# EAGLE board SAME54-board-1.0.1 (EAGLE 9.6.2)
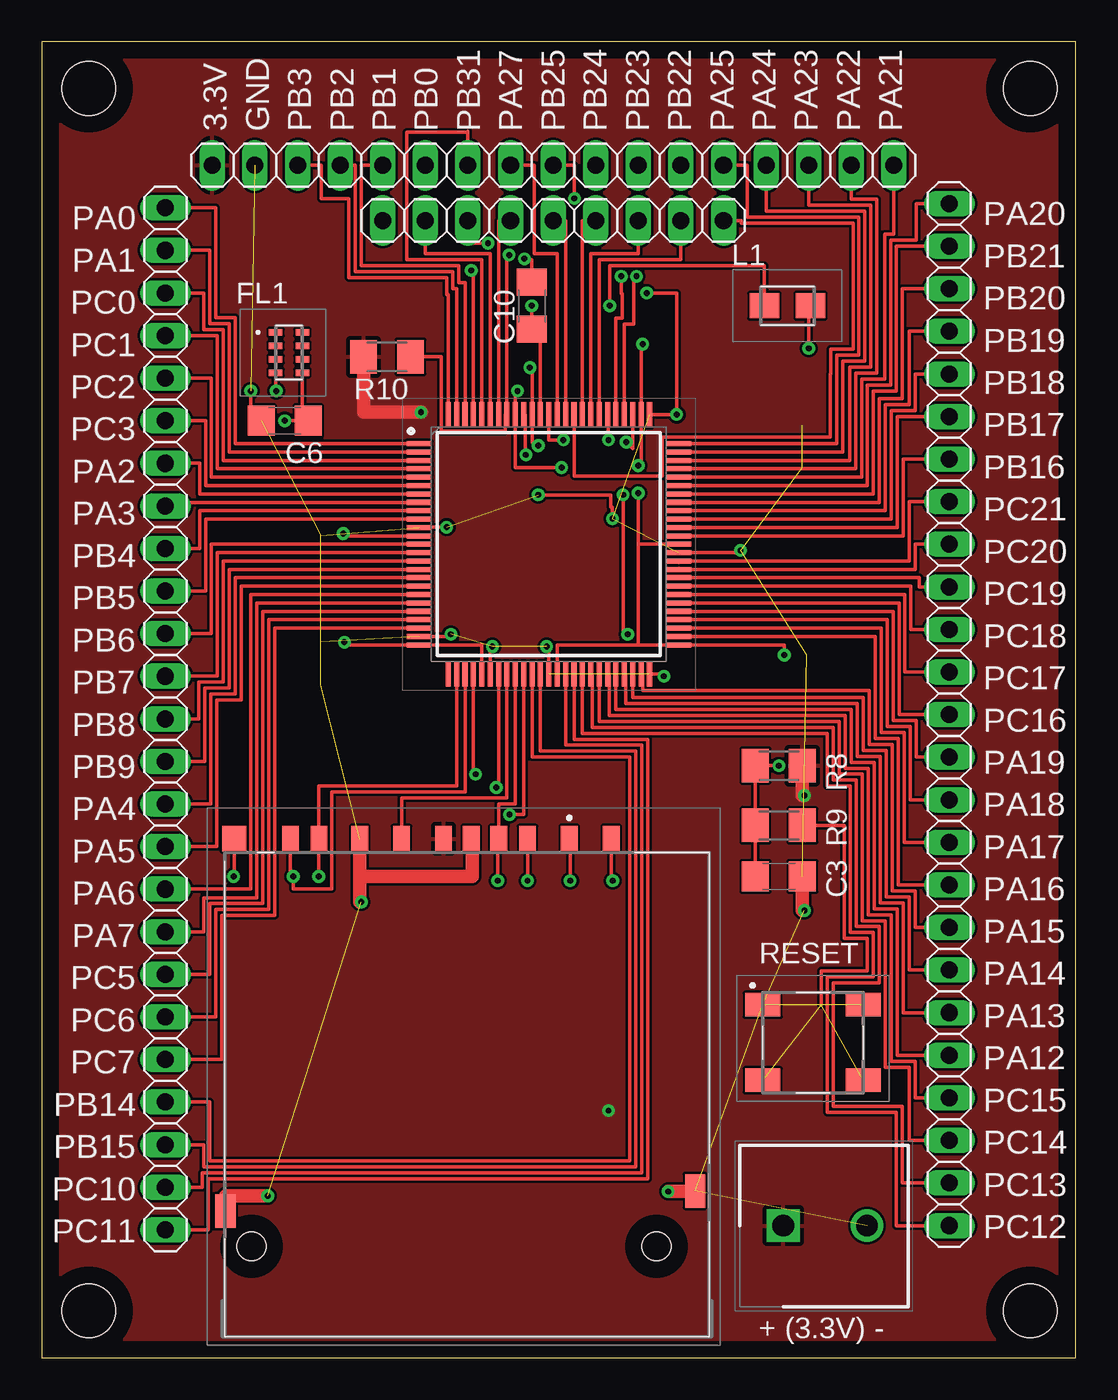
[diagram p0: board, top side]
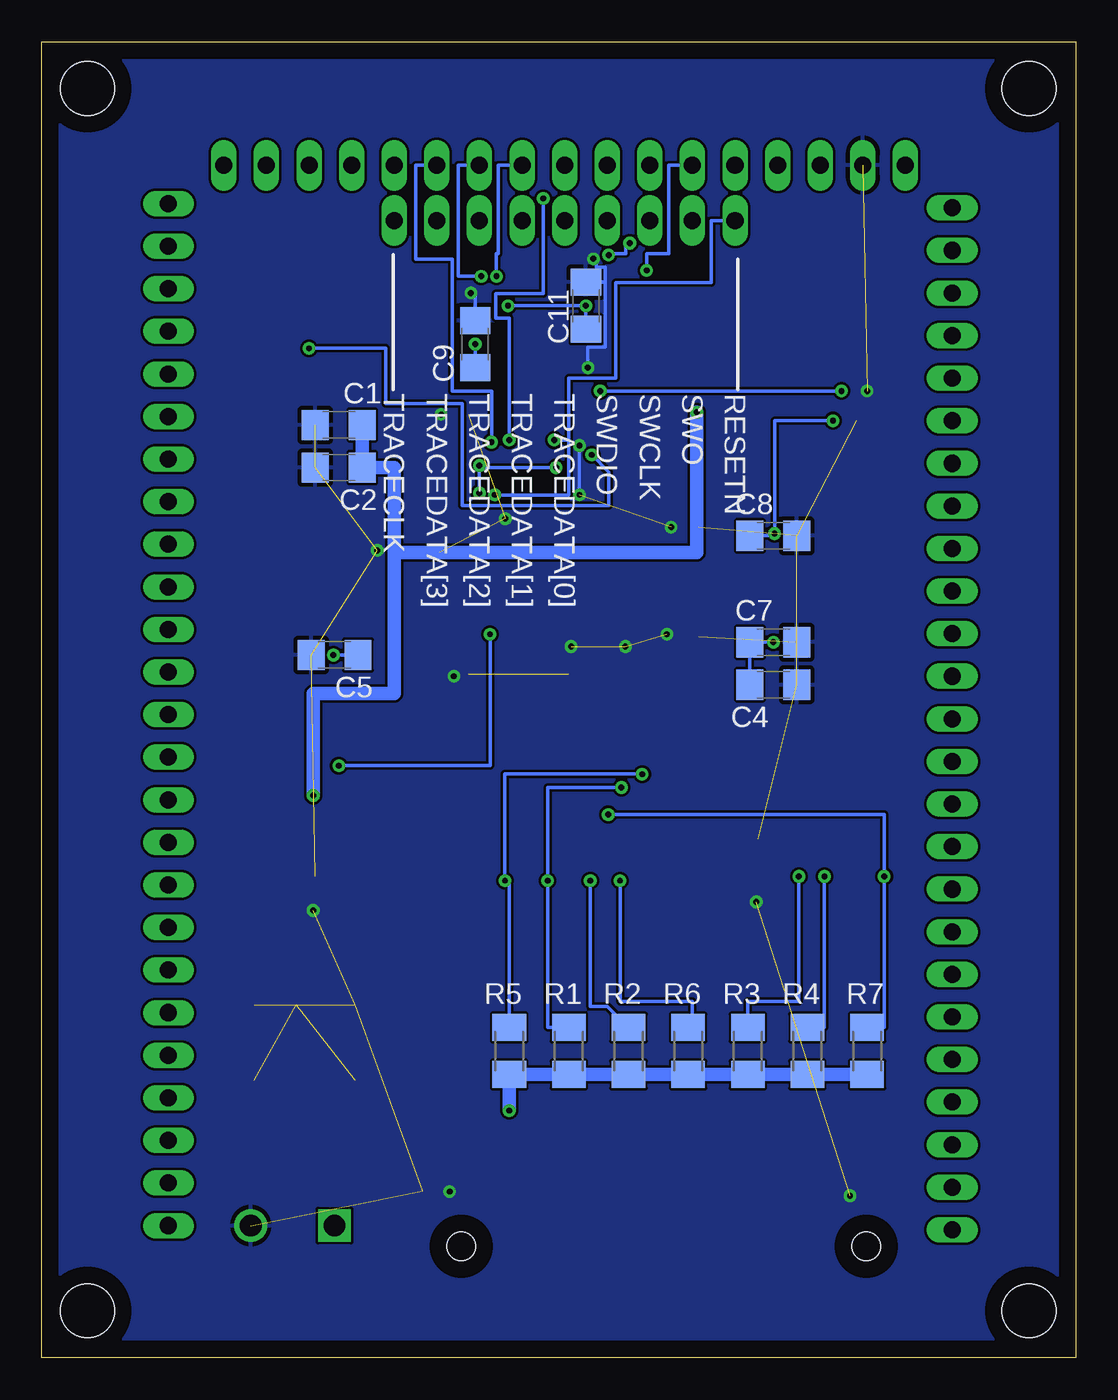
[diagram p1: board, bottom side, seen from below]

Size 61.65 x 78.48 mm. Coordinates in mm from the lower left corner, seen from the top.
Outline: 0,0 61.65,0 61.65,78.48 0,78.48 0,0
Copper layers (1*16): Top 0.035mm / dielectric 1.5mm / Bottom 0.035mm
Design rules "default": minimum track width 6mil, minimum drill 0.35mm, track to track 6mil, track to pad 6mil, pad to pad 6mil, via to via 6mil, smd to smd 6mil, copper to edge 40mil, drill to drill 6mil, minimum pad ring 10mil, minimum via ring 8mil, stop-mask expansion 4mil, vias tented up to drill 0mil, thermal gap 10mil
Holes 3.2 mm at 2.79,2.79 58.93,2.79 2.79,75.69 58.93,75.69

## Footprints (pad centres in the part's own frame; a part is rotated, then mirrored left to right if it is on the bottom)
C1206 = smd 1.6 x 1.8: 1 -1.4,0; 2 1.4,0
BLA31AG102SN4D = smd 0.8 x 0.4: 1 -0.8,1.2; 2 -0.8,0.4; 3 -0.8,-0.4; 4 -0.8,-1.2; 5 0.8,-1.2; 6 0.8,-0.4; 7 0.8,0.4; 8 0.8,1.2
QFP50P1600X1600X120-100N = smd 1.475 x 0.3: 1 -7.738,6; 2 -7.738,5.5; 3 -7.738,5; 4 -7.738,4.5; 5 -7.738,4; 6 -7.738,3.5; 7 -7.738,3; 8 -7.738,2.5; 9 -7.738,2; 10 -7.738,1.5; 11 -7.738,1; 12 -7.738,0.5; 13 -7.738,0; 14 -7.738,-0.5; 15 -7.738,-1; 16 -7.738,-1.5; 17 -7.738,-2; 18 -7.738,-2.5; 19 -7.738,-3; 20 -7.738,-3.5; 21 -7.738,-4; 22 -7.738,-4.5; 23 -7.738,-5; 24 -7.738,-5.5; 25 -7.738,-6; 51 7.738,-6; 52 7.738,-5.5; 53 7.738,-5; 54 7.738,-4.5; 55 7.738,-4; 56 7.738,-3.5; 57 7.738,-3; 58 7.738,-2.5; 59 7.738,-2; 60 7.738,-1.5; 61 7.738,-1; 62 7.738,-0.5; 63 7.738,0; 64 7.738,0.5; 65 7.738,1; 66 7.738,1.5; 67 7.738,2; 68 7.738,2.5; 69 7.738,3; 70 7.738,3.5; 71 7.738,4; 72 7.738,4.5; 73 7.738,5; 74 7.738,5.5; 75 7.738,6 | smd 0.3 x 1.475: 26 -6,-7.738; 27 -5.5,-7.738; 28 -5,-7.738; 29 -4.5,-7.738; 30 -4,-7.738; 31 -3.5,-7.738; 32 -3,-7.738; 33 -2.5,-7.738; 34 -2,-7.738; 35 -1.5,-7.738; 36 -1,-7.738; 37 -0.5,-7.738; 38 0,-7.738; 39 0.5,-7.738; 40 1,-7.738; 41 1.5,-7.738; 42 2,-7.738; 43 2.5,-7.738; 44 3,-7.738; 45 3.5,-7.738; 46 4,-7.738; 47 4.5,-7.738; 48 5,-7.738; 49 5.5,-7.738; 50 6,-7.738; 76 6,7.738; 77 5.5,7.738; 78 5,7.738; 79 4.5,7.738; 80 4,7.738; 81 3.5,7.738; 82 3,7.738; 83 2.5,7.738; 84 2,7.738; 85 1.5,7.738; 86 1,7.738; 87 0.5,7.738; 88 0,7.738; 89 -0.5,7.738; 90 -1,7.738; 91 -1.5,7.738; 92 -2,7.738; 93 -2.5,7.738; 94 -3,7.738; 95 -3.5,7.738; 96 -4,7.738; 97 -4.5,7.738; 98 -5,7.738; 99 -5.5,7.738; 100 -6,7.738
GSD09002SEU = smd 1.5 x 1: 1 -14.183,6.3; 2 -14.183,3.8; 3 -14.183,0.45; 4 -14.183,-1.2; 5 -14.183,-3.7; 6 -14.183,-6.2; 7 -14.183,-8.63; 8 -14.183,-10.33; 9 -14.183,8.8; CD1 -14.183,2.1 | smd 2 x 1.2: G1 6.827,13.8; G2 8.027,-14.2 | smd 1.5 x 1.45: WP1 -14.183,-13.68 | hole 1.7: 10.127,11.5; 10.127,-12.65
SHDR2W110P0X500_1X2_1000X950X1 = drill 1.3 pad 1.95 square: 1 0,0 | drill 1.3 pad 1.95: 2 5,0
1X25 = drill 1.016 long: 1 -29.21,0; 2 -26.67,0; 3 -24.13,0; 4 -21.59,0; 5 -19.05,0; 6 -16.51,0; 7 -13.97,0; 8 -11.43,0; 9 -8.89,0; 10 -6.35,0; 11 -3.81,0; 12 -1.27,0; 13 1.27,0; 14 3.81,0; 15 6.35,0; 16 8.89,0; 17 11.43,0; 18 13.97,0; 19 16.51,0; 20 19.05,0; 21 21.59,0; 22 24.13,0; 23 26.67,0; 24 29.21,0; 25 31.75,0
1X09 = drill 1.016 long: 1 -10.16,0; 2 -7.62,0; 3 -5.08,0; 4 -2.54,0; 5 0,0; 6 2.54,0; 7 5.08,0; 8 7.62,0; 9 10.16,0
1X17 = drill 1.016 long: 1 -20.32,0; 2 -17.78,0; 3 -15.24,0; 4 -12.7,0; 5 -10.16,0; 6 -7.62,0; 7 -5.08,0; 8 -2.54,0; 9 0,0; 10 2.54,0; 11 5.08,0; 12 7.62,0; 13 10.16,0; 14 12.7,0; 15 15.24,0; 16 17.78,0; 17 20.32,0
LQH31CN100K03L = smd 1.75 x 1.5: 1 -1.375,0; 2 1.375,0
M1206 = smd 1.6 x 2: 1 -1.4,0; 2 1.4,0
LL3301BF065QJ = smd 2.1 x 1.4: 1 -3,2.25; 2 3,2.25; 3 -3,-2.25; 4 3,-2.25

## Placement (x,y rotation side)
C1  100n  [C1206]  43.94,55.63 180 bottom
C2  10uF/10V  [C1206]  43.94,53.09 180 bottom
C3  100n  [C1206]  43.94,28.7 0 top
C4  10u  [C1206]  18.03,40.13 0 bottom
C5  10u  [C1206]  44.2,41.91 180 bottom
C6  10u  [C1206]  14.48,55.88 180 top
C7  100n  [C1206]  18.03,42.67 0 bottom
C8  100n  [C1206]  18.03,49.02 0 bottom
C9  100n  [C1206]  35.81,60.45 90 bottom
C10  4.7u  [C1206]  29.21,62.74 90 top
C11  100n  [C1206]  29.21,62.74 90 bottom
FL1  BLA31AG221SN4D  [BLA31AG102SN4D]  14.73,59.94 0 top
IC1  ATSAME54N20A-AUT  [QFP50P1600X1600X120-100N]  30.23,48.51 0 top
J1  GSD09002SEU  [GSD09002SEU]  25.15,16.76 270 top
J2  1985920  [SHDR2W110P0X500_1X2_1000X950X1]  44.2,7.87 0 top
JP1  [1X25]  54.1,39.62 270 top
JP2  [1X25]  7.37,36.83 90 top
JP4  [1X09]  30.48,67.82 0 top
JP7  [1X17]  30.48,71.12 0 top
L1  LQH31MN100J03L  [LQH31CN100K03L]  44.45,62.74 0 top
R1  100k  [M1206]  30.23,18.29 270 bottom
R2  10k  [M1206]  26.67,18.29 270 bottom
R3  100k  [M1206]  19.56,18.29 270 bottom
R4  100k  [M1206]  16,18.29 270 bottom
R5  100k  [M1206]  33.78,18.29 270 bottom
R6  10k  [M1206]  23.11,18.29 270 bottom
R7  10k  [M1206]  12.45,18.29 270 bottom
R8  10k  [M1206]  43.94,35.31 0 top
R9  330  [M1206]  43.94,31.75 0 top
R10  1k  [M1206]  20.57,59.69 180 top
S1  LL3301BF065QJ  [LL3301BF065QJ]  45.97,18.8 0 top

## Library data of the parts
C1-C11 = rcl; SPICEPREFIX: C
FL1 = SamacSys_Parts; DESCRIPTION: Murata Power Solutions Ferrite Bead, 3.2 x 1.6 x 0.8mm (3216), 220 impedance at 100 MHz; HEIGHT: 1mm; MANUFACTURER_NAME: Murata Electronics; MANUFACTURER_PART_NUMBER: BLA31AG221SN4D; MOUSER_PART_NUMBER: 81-BLA31AG221SN4D; MOUSER_PRICE-STOCK: https://www.mouser.com/Search/Refine.aspx?Keyword=81-BLA31AG221SN4D
IC1 = SamacSys_Parts; DESCRIPTION: ARM Microcontrollers - MCU 120MHZ 1024KB FLASH 100 TQFP PKG IN 85C; HEIGHT: 1.2mm; MANUFACTURER_NAME: Microchip; MANUFACTURER_PART_NUMBER: ATSAME54N20A-AUT; MOUSER_PART_NUMBER: 556-ATSAME54N20AAUT; MOUSER_PRICE-STOCK: https://www.mouser.co.uk/ProductDetail/Microchip-Technology/ATSAME54N20A-AUT?qs=HXFqYaX1Q2wziE5NRG3J9w%3D%3D
J1 = SamacSys_Parts; DESCRIPTION: Memory Card Connectors SD, 9 pos, 15U; HEIGHT: 2.75mm; MANUFACTURER_NAME: Amphenol; MANUFACTURER_PART_NUMBER: GSD09002SEU; MOUSER_PART_NUMBER: 523-GSD09002SEU; MOUSER_PRICE-STOCK: https://www.mouser.co.uk/ProductDetail/Amphenol-Commercial-Products/GSD09002SEU?qs=J%2Fw1naXNy4LtG6w9y13mdQ%3D%3D
J2 = SamacSys_Parts; DESCRIPTION: Fixed Terminal Blocks MKDSN 2.5/ 2 HT BK; HEIGHT: 15.15mm; MANUFACTURER_NAME: Phoenix Contact; MANUFACTURER_PART_NUMBER: 1985920; MOUSER_PART_NUMBER: 651-1985920; MOUSER_PRICE-STOCK: https://www.mouser.com/Search/Refine.aspx?Keyword=651-1985920
JP1 JP2 JP4 JP7 = pinhead
L1 = SamacSys_Parts; DESCRIPTION: Murata LQH31MN Series Wire-wound SMD Inductor 10 uH +/-5% 100mA Idc Q:35; HEIGHT: 2mm; MANUFACTURER_NAME: Murata Electronics; MANUFACTURER_PART_NUMBER: LQH31MN100J03L; MOUSER_PART_NUMBER: 81-LQH31MN100J03L; MOUSER_PRICE-STOCK: https://www.mouser.co.uk/ProductDetail/Murata-Electronics/LQH31MN100J03L?qs=nr3D09lmWEs2Q3QeLFujyQ%3D%3D
R1-R10 = rcl; SPICEPREFIX: R
S1 = SamacSys_Parts; DESCRIPTION: Pushbutton Switches 50mA 12VDC F065 9.5mm J-Lead; HEIGHT: 9.8mm; MANUFACTURER_NAME: E-Switch; MANUFACTURER_PART_NUMBER: LL3301BF065QJ; MOUSER_PART_NUMBER: 612-LL3301BF065QJ; MOUSER_PRICE-STOCK: https://www.mouser.co.uk/ProductDetail/E-Switch/LL3301BF065QJ?qs=QtyuwXswaQgf5j8qoJZz7w%3D%3D

## Nets
GND: C1.2 C2.2 C3.2 C4.2 C5.2 C6.2 C7.2 C8.2 C9.2 C10.2 C11.2 IC1.11 IC1.24 IC1.31 IC1.38 IC1.50 IC1.62 IC1.76 IC1.90 J1.3 J1.6 J1.G1 J1.G2 J2.2 JP7.2 S1.1 S1.2
N$1: IC1.23 JP2.5
N$2: J1.2 R2.1
N$3: IC1.22 JP2.6
N$4: R9.2 S1.3 S1.4
N$5: IC1.21 JP2.7
N$6: IC1.20 JP2.8
N$8: IC1.19 JP2.9
N$9: IC1.18 JP2.10
N$10: IC1.17 JP2.11
N$11: IC1.16 JP2.12
N$12: IC1.15 JP2.13
N$13: IC1.14 JP2.14
N$14: IC1.13 JP2.15
N$15: IC1.10 JP2.16
N$16: IC1.9 JP2.17
N$17: IC1.8 JP2.18
N$18: IC1.7 JP2.19
N$19: IC1.6 JP2.20
N$20: IC1.5 JP2.21
N$21: IC1.4 JP2.22
N$22: IC1.3 JP2.23
N$23: IC1.2 JP2.24
N$26: IC1.73 JP7.15
N$29: IC1.70 JP1.1
N$30: IC1.69 JP1.2
N$31: IC1.68 JP1.3
N$32: IC1.67 JP1.4
N$33: IC1.66 JP1.5
N$34: IC1.65 JP1.6
N$35: IC1.64 JP1.7
N$36: IC1.61 JP1.8
N$37: IC1.60 JP1.9
N$38: IC1.59 JP1.10
N$39: IC1.58 JP1.11
N$40: IC1.57 JP1.12
N$41: IC1.56 JP1.13
N$42: IC1.55 JP1.14
N$43: IC1.54 JP1.15
N$44: IC1.53 JP1.16
N$45: IC1.52 JP1.17
N$46: IC1.49 JP1.18
N$47: IC1.48 JP1.19
N$48: IC1.41 JP2.1
N$49: IC1.47 JP1.20
N$50: IC1.46 JP1.21
N$51: IC1.45 JP1.22
N$52: IC1.44 JP1.23
N$53: IC1.43 JP1.24
N$54: IC1.42 JP1.25
N$55: IC1.40 JP2.2
N$56: IC1.37 JP2.3
N$57: IC1.36 JP2.4
N$58: IC1.1 JP2.25
PA21: IC1.71 JP7.17
PA22: IC1.72 JP7.16
PA24: IC1.74 JP7.14
PA25: IC1.75 JP7.13
PA27: IC1.87 JP7.8
PB0: IC1.97 JP7.6
PB1: IC1.98 JP7.5
PB2: IC1.99 JP7.4
PB3: IC1.100 JP7.3
PB22: IC1.78 JP7.12
PB23: IC1.79 JP7.11
PB24: IC1.80 JP7.10
PB25: IC1.81 JP7.9
PB31: IC1.96 JP7.7
RESETN: C3.1 IC1.88 JP4.1 R8.1 R9.1
SDCD: IC1.34 J1.CD1 R6.1
SDCK: IC1.33 J1.5
SDCMD: IC1.26
SDDAT[0]: IC1.27 J1.7 R3.1
SDDAT[1]: IC1.28 J1.8 R4.1
SDDAT[2]: IC1.29 J1.9 R5.1
SDDAT[3]: IC1.32 J1.1 R1.1
SDWP: IC1.35 J1.WP1 R7.1
SWDCLK: IC1.93 JP4.3 R10.1
SWDIO: IC1.94 JP4.4
SWO: IC1.95 JP4.2
TRACECLK: IC1.85 JP4.9
TRACEDATA[0]: IC1.86 JP4.5
TRACEDATA[1]: IC1.84 JP4.6
TRACEDATA[2]: IC1.83 JP4.7
TRACEDATA[3]: IC1.82 JP4.8
VCC: C1.1 C2.1 J1.4 J2.1 JP7.1 R1.2 R2.2 R3.2 R4.2 R5.2 R6.2 R7.2 R8.2 R10.2
VDDANA: C6.1 C8.1 FL1.5 FL1.6 FL1.7 FL1.8 IC1.12
VDDCORE: C10.1 C11.1 IC1.89 L1.1
VDDIO: C5.1 C9.1 FL1.1 FL1.2 FL1.3 FL1.4 IC1.39 IC1.51 IC1.63 IC1.77 IC1.92
VDDIOB: C4.1 C7.1 IC1.25 IC1.30
VSW: IC1.91 L1.2

## Tracks (layer width: path | path; a pad name or v marks a point on that pad's centre or on a via)
GND  (via drill 0.35)  (22 unrouted)
  Top 0.203: 29.18,56.25 IC1.90 | IC1.90 29.23,59.05 v29.09,59.05 | v28.77,65.54 29.01,65.54 29.01,65.48 29.21,65.48 C10.2 | v36.07,63.5 37.85,63.5 v37.85,56.25 IC1.76 | IC1.90 29.23,54.58 29.59,54.58 v29.59,54.4 | v29.59,51.46 33.92,51.46 33.92,50.73 34.02,50.73 v34.02,50.04 | IC1.62 41.66,48.01 v41.66,48.15 | IC1.50 37.08,40.78 v37.08,40.64 | IC1.38 30.23,42.42 v30.09,42.42 | IC1.31 26.73,42.42 v26.86,42.42 | IC1.24 24.38,43.01 v24.38,43.15 | C6.2 12.45,55.88 v12.45,57.66 | IC1.11 22.49,49.53 v24.13,49.53
  Top 0.813: J1.3 25.65,30.95 25.65,28.7 18.95,28.7 J1.6 18.95,27.18 v19.05,27.18 | J1.G2 10.95,9.65 v13.46,9.65 | J1.G1 38.95,9.91 v37.34,9.91 | C3.2 45.34,26.67 v45.47,26.67
  Bottom 0.203: v29.09,59.05 29.09,60.28 28.06,60.28 28.06,64.14 | 28.06,64.14 C10.2 | 28.06,64.14 28.06,65.03 28.59,65.03 28.59,65.54 v28.77,65.54 | C9.2 35.81,63.5 v36.07,63.5 | v29.59,54.4 v29.59,51.46
  pour Bottom: -1.02,81.03 -1.02,-1.02 62.23,-1.02 62.23,81.03 -0.76,81.03
N$1
  Top 0.203: IC1.23 13.87,43.51 13.87,26.36 10.72,26.36 10.72,17.78 JP2.5
N$2  (via drill 0.35)
  Top 0.203: v28.96,28.45 J1.2
  Bottom 0.203: R2.1 27.94,20.96 28.96,20.96 v28.96,28.45
N$3
  Top 0.203: JP2.6 10.36,20.32 10.36,26.72 13.51,26.72 13.51,44.01 IC1.22
N$4  (2 unrouted)
  Top 0.203: 46.48,21.05 46.48,23.06 49.23,23.06 49.23,24.99 47.85,24.99 47.85,31.75 R9.2
N$5
  Top 0.203: IC1.21 13.16,44.51 13.16,27.08 10.01,27.08 10.01,22.86 JP2.7
N$6
  Top 0.203: IC1.20 12.8,45.01 12.8,27.43 9.65,27.43 9.65,25.4 JP2.8
N$8
  Top 0.203: IC1.19 12.45,45.51 12.45,27.94 JP2.9
N$9
  Top 0.203: IC1.18 11.89,46.01 11.89,39.22 10.41,39.22 10.41,30.48 JP2.10
N$10
  Top 0.203: IC1.17 11.53,46.51 11.53,39.57 10.06,39.57 10.06,33.02 JP2.11
N$11
  Top 0.203: IC1.16 11.18,47.01 11.18,39.93 9.7,39.93 9.7,35.56 JP2.12
N$12
  Top 0.203: IC1.15 10.82,47.51 10.82,40.28 9.35,40.28 9.35,38.1 JP2.13
N$13
  Top 0.203: IC1.14 10.46,48.01 10.46,40.64 JP2.14
N$14
  Top 0.203: IC1.13 10.11,48.51 10.11,43.18 JP2.15
N$15
  Top 0.203: IC1.10 9.75,50.01 9.75,45.72 JP2.16
N$16
  Top 0.203: IC1.9 9.4,50.51 9.4,48.26 JP2.17
N$17
  Top 0.203: IC1.8 7.37,51.01 JP2.18
N$18
  Top 0.203: IC1.7 9.4,51.51 9.4,53.34 JP2.19
N$19
  Top 0.203: IC1.6 9.75,52.01 9.75,55.88 JP2.20
N$20
  Top 0.203: IC1.5 10.11,52.51 10.11,58.42 JP2.21
N$21
  Top 0.203: IC1.4 10.46,53.01 10.46,60.96 JP2.22
N$22
  Top 0.203: IC1.3 10.82,53.51 10.82,61.32 9.65,61.32 9.65,63.5 JP2.23
N$23
  Top 0.203: IC1.2 11.18,54.01 11.18,61.67 10.01,61.67 10.01,66.04 JP2.24
N$26
  Top 0.203: IC1.73 48.16,53.51 48.16,59.08 49.43,59.08 49.43,68.73 45.72,68.73 JP7.15
N$29
  Top 0.203: IC1.70 49.23,52.01 49.23,58.01 50.6,58.01 50.6,66.65 52.12,66.65 52.12,68.83 JP1.1
N$30
  Top 0.203: IC1.69 49.58,51.51 49.58,57.66 50.95,57.66 50.95,66.29 JP1.2
N$31
  Top 0.203: IC1.68 49.94,51.01 49.94,56.64 49.94,56.78 49.94,57.2 51.31,57.2 51.31,63.75 JP1.3
N$32
  Top 0.203: IC1.67 50.29,50.51 50.29,56.84 51.71,56.84 51.71,61.21 JP1.4
N$33
  Top 0.203: IC1.66 50.65,50.01 50.65,56.49 52.07,56.49 52.07,58.67 JP1.5
N$34
  Top 0.203: IC1.65 51,49.51 51,56.13 JP1.6
N$35
  Top 0.203: IC1.64 51.36,49.01 51.36,53.59 JP1.7
N$36
  Top 0.203: JP1.8 51.71,51.05 51.71,48.51 51.71,47.51 IC1.61 37.96,47.42
N$37
  Top 0.203: IC1.60 52.07,47.01 52.07,48.51 JP1.9
N$38
  Top 0.203: IC1.59 52.32,46.51 52.32,45.97 JP1.10
N$39
  Top 0.203: IC1.58 51.82,46.01 51.82,43.43 JP1.11
N$40
  Top 0.203: JP1.12 51.46,40.89 51.46,45.51 IC1.57
N$41
  Top 0.203: IC1.56 51.1,45.01 51.1,38.35 JP1.13
N$42
  Top 0.203: JP1.14 52.12,35.81 52.12,38 50.75,38 50.75,44.51 IC1.55
N$43
  Top 0.203: IC1.54 50.39,44.01 50.39,37.64 51.77,37.64 51.77,33.27 JP1.15
N$44
  Top 0.203: JP1.16 51.41,30.73 51.41,37.29 50.04,37.29 50.04,43.51 IC1.53
N$45
  Top 0.203: IC1.52 49.68,43.01 49.68,36.93 51.05,36.93 51.05,28.19 JP1.17
N$46
  Top 0.203: JP1.18 52.07,25.65 52.07,27.84 50.7,27.84 50.7,36.58 49.33,36.58 49.33,39.78 35.82,39.78 35.82,40.78 IC1.49
N$47
  Top 0.203: IC1.48 35.23,39.37 48.97,39.37 48.97,36.22 50.34,36.22 50.34,27.48 51.71,27.48 51.71,23.11 JP1.19
N$48
  Top 0.203: JP2.1 9.91,7.62 9.91,10.67 36.12,10.67 36.12,36.88 31.73,36.88 IC1.41
N$49
  Top 0.203: JP1.20 51.36,20.57 51.36,27.13 49.99,27.13 49.99,35.87 48.62,35.87 48.62,39.01 34.82,39.01 34.82,40.78 IC1.47
N$50
  Top 0.203: JP1.21 51,18.03 51,26.77 49.63,26.77 49.63,35.51 48.26,35.51 48.26,38.66 34.23,38.66 IC1.46
N$51
  Top 0.203: IC1.45 33.82,40.78 33.82,38.3 47.9,38.3 47.9,35.15 49.28,35.15 49.28,26.42 50.65,26.42 50.65,17.68 52.07,17.68 52.07,15.49 JP1.22
N$52
  Top 0.203: JP1.23 51.71,12.95 51.71,17.32 50.29,17.32 50.29,26.06 48.92,26.06 48.92,34.8 47.55,34.8 47.55,37.95 33.23,37.95 IC1.44
N$53
  Top 0.203: IC1.43 32.82,40.78 32.82,37.59 47.19,37.59 47.19,34.44 48.56,34.44 48.56,25.7 49.94,25.7 49.94,22.35 47.19,22.35 47.19,14.99 51.31,14.99 51.31,10.41 JP1.24
N$54
  Top 0.203: JP1.25 50.95,7.87 50.95,14.63 46.84,14.63 46.84,22.71 49.58,22.71 49.58,25.35 48.21,25.35 48.21,34.09 46.84,34.09 46.84,37.24 32.23,37.24 IC1.42
N$55
  Top 0.203: JP2.2 9.55,10.16 9.55,11.02 35.76,11.02 35.76,36.52 31.23,36.52 IC1.40
N$56
  Top 0.203: JP2.3 9.65,12.7 9.65,11.38 35.41,11.38 35.41,36.17 29.73,36.17 IC1.37
N$57
  Top 0.203: JP2.4 10.01,15.24 10.01,11.73 35.05,11.73 35.05,35.81 29.23,35.81 IC1.36
N$58
  Top 0.203: IC1.1 11.53,54.51 11.53,62.03 10.36,62.03 10.36,68.58 JP2.25
PA21
  Top 0.203: IC1.71 48.87,52.51 48.87,58.37 50.24,58.37 50.24,67 50.8,67 JP7.17
PA22
  Top 0.203: IC1.72 48.51,53.01 48.51,58.73 49.78,58.73 49.78,69.09 48.26,69.09 JP7.16
PA24
  Top 0.203: IC1.74 47.75,54.01 47.75,59.44 49.07,59.44 49.07,68.38 43.18,68.38 JP7.14
PA25
  Top 0.203: IC1.75 47.4,54.51 47.4,59.79 48.72,59.79 48.72,68.02 42.06,68.02 42.06,71.12 JP7.13
PA27
  Top 0.203: IC1.87 30.73,65.84 29.36,65.84 29.36,71.12 JP7.8
PB0  (via drill 0.35)
  Top 0.203: IC1.97 25.73,64.85 v25.59,64.85
  Bottom 0.203: v25.59,64.85 25.59,65.84 24.28,65.84 24.28,71.12 JP7.6
PB1
  Top 0.203: IC1.98 25.23,64.11 24.86,64.11 24.86,65.13 19.05,65.13 19.05,71.12 JP7.5
PB2
  Top 0.203: IC1.99 24.73,63.76 24.5,63.76 24.5,64.77 18.69,64.77 18.69,71.12 JP7.4
PB3
  Top 0.203: IC1.100 24.23,63.4 24.15,63.4 24.15,64.41 18.29,64.41 18.29,69.14 16.66,69.14 16.66,71.12 JP7.3
PB22  (via drill 0.35)
  Top 0.203: IC1.78 35.23,54.22 v34.84,54.61
  Bottom 0.203: v34.84,54.61 34.84,57.66 37.19,57.66 37.19,65.53 39.37,65.53 39.37,71.12 JP7.12
PB23  (via drill 0.35)
  Top 0.203: IC1.79 34.73,61.65 35.28,61.65 35.28,64.49 v35.45,64.49
  Bottom 0.203: v35.45,64.49 36.83,64.49 36.83,71.12 JP7.11
PB24  (via drill 0.35)
  Top 0.203: IC1.80 34.23,62 34.59,62 34.59,63.47 34.54,63.47 v34.54,64.49
  Bottom 0.203: v34.54,64.49 34.54,65.84 34.44,65.84 34.44,71.12 JP7.10
PB25  (via drill 0.35)
  Top 0.203: JP7.9 31.75,71.12 v31.75,69.14 | v33.78,54.73 33.78,56.25 IC1.81
  Bottom 0.203: v31.75,69.14 31.75,63.47 34.59,63.47 34.59,62 33.78,62 v33.78,54.73
PB31
  Top 0.203: IC1.96 26.23,65.48 21.74,65.48 21.74,73.1 25.4,73.1 | 25.4,73.1 25.4,73.15 | 25.4,73.1 JP7.7
RESETN  (via drill 0.35)
  Top 0.203: IC1.88 30.23,54.73 v31.09,54.73 | v34.65,51.46 34.65,43.15 v34.93,43.15 | v43.94,35.31 R8.1 R9.1 C3.1
  Bottom 0.203: 30.23,54.73 30.23,58.42 27.43,58.42 27.43,64.11 21.74,64.11 21.74,67.82 JP4.1 | v34.65,51.46 30.23,51.46 30.23,54.73 | v34.93,43.15 34.93,35.31 v43.94,35.31 | v31.09,54.73 30.23,54.73
SDCD  (via drill 0.35)
  Top 0.203: v27.18,28.45 27.18,30.95 J1.CD1 27.25,33.02 28.23,33.02 IC1.34
  Bottom 0.203: R6.1 22.88,19.93 22.88,21.25 27.18,21.25 v27.18,28.45
SDCK
  Top 0.203: IC1.33 27.73,33.38 21.45,33.38 J1.5
SDDAT[0]  (via drill 0.35)
  Top 0.203: v16.51,28.7 v16.52,28.7 J1.7 16.52,34.09 24.73,34.09 IC1.27
  Bottom 0.203: v16.51,28.7 16.51,21.25 19.56,21.25 R3.1
SDDAT[1]  (via drill 0.35)
  Top 0.203: J1.8 14.82,28.7 v14.99,28.7 14.99,27.94 17.27,27.94 17.27,33.73 25.23,33.73 IC1.28
  Bottom 0.203: R4.1 14.99,19.69 v14.99,28.7
SDDAT[2]  (via drill 0.35)
  Top 0.203: v34.04,28.45 33.95,28.45 J1.9 | IC1.29 25.73,34.8 v25.86,34.8
  Bottom 0.203: R5.1 33.78,28.45 v34.04,28.45 34.04,34.8 v25.86,34.8
SDDAT[3]  (via drill 0.35)
  Top 0.203: v31.5,28.45 31.5,30.95 J1.1 | IC1.32 27.23,34.01 v27.09,34.01
  Bottom 0.203: R1.1 31.5,19.69 v31.5,28.45 31.5,34.01 v27.09,34.01
SDWP  (via drill 0.35)
  Top 0.203: J1.WP1 11.47,28.7 v11.43,28.7 | IC1.35 28.73,32.39 v27.88,32.39
  Bottom 0.203: R7.1 11.43,19.69 v11.43,28.7 11.43,32.39 v27.88,32.39
SWDCLK  (via drill 0.35)
  Top 0.203: JP4.3 25.4,66.47 v26.59,66.47 | v27.86,65.76 27.73,65.76 IC1.93 27.63,56.25 27.63,55.26 23.82,55.26 23.82,59.69 R10.1
  Bottom 0.203: v26.59,66.47 26.82,66.47 26.82,65.84 27.86,65.84 v27.86,65.76
SWDIO
  Top 0.203: JP4.4 27.23,67.82 IC1.94
SWO
  Top 0.203: JP4.2 22.86,65.84 26.73,65.84 IC1.95
TRACECLK
  Top 0.203: JP4.9 41.71,67.82 41.71,67.67 48.36,67.67 48.36,60.15 47.04,60.15 47.04,58.67 46.99,58.67 46.99,55.12 46.99,54.92 36.97,54.92 36.97,52.58 31.73,52.58 IC1.85
TRACEDATA[0]
  Top 0.203: JP4.5 31.23,67.82 IC1.86
TRACEDATA[1]
  Top 0.203: IC1.84 32.23,67.82 JP4.6
TRACEDATA[2]
  Top 0.203: JP4.7 35.56,65.84 32.73,65.84 IC1.83
TRACEDATA[3]
  Top 0.203: JP4.8 38.1,65.48 33.23,65.48 IC1.82
VCC  (via drill 0.35)
  Top 0.813: R8.2 45.34,33.53 v45.47,33.53 | v22.61,56.39 19.17,56.39 R10.2
  Bottom 0.813: R7.2 R4.2 R3.2 R6.2 26.16,16.89 26.16,16.76 26.67,16.76 R2.2 R1.2 R5.2 v33.78,14.73 | C1.1 C2.1 40.64,53.09 40.64,48.01 | v45.47,33.53 45.47,39.62 40.64,39.62 40.64,48.01 | 40.64,48.01 22.61,48.01 v22.61,56.39
  pour Top: -0.51,80.26 -0.51,-0.51 61.98,-0.51 61.98,80.26
VDDANA  (via drill 0.35)
  Top 0.203: IC1.12 17.96,49.01 v17.96,49.15 | FL1.8 FL1.7 FL1.6 FL1.5 15.53,55.88 C6.1 v14.48,55.88
  Bottom 0.203: C8.1 17.96,49.02 v17.96,49.15 17.96,55.88 v14.48,55.88
VDDCORE  (via drill 0.35)
  Top 0.203: IC1.89 29.73,61.34 C10.1 v29.21,62.74 | v33.86,62.74 33.86,65.13 43.08,65.13 L1.1
  Bottom 0.203: C10.1 v29.21,62.74 v33.86,62.74
VDDIO  (via drill 0.35)
  Top 0.203: v35.81,60.45 35.73,60.45 IC1.77 35.73,53.21 v35.56,53.21 | v30.99,53.09 28.23,53.09 IC1.92 28.23,57.66 v28.36,57.66 | v35.56,51.56 35.56,48.51 | 35.56,48.51 IC1.63 | 35.56,48.51 35.56,42.51 | 35.56,42.51 IC1.51 44.27,42.51 v44.27,41.91 | 35.56,42.51 30.73,42.51 IC1.39 | FL1.1 FL1.2 FL1.3 FL1.4 13.93,57.66 v13.97,57.66
  Bottom 0.203: v35.81,60.45 C9.1 | v28.36,57.66 v13.97,57.66 | v44.27,41.91 C5.1 | v30.99,53.09 35.56,53.09 | 35.56,53.09 v35.56,51.56 | v35.56,53.21 35.56,53.09
VDDIOB  (via drill 0.35)
  Top 0.203: IC1.30 26.23,42.51 IC1.25 18.03,42.51 v18.03,42.67
  Bottom 0.203: v18.03,42.67 C7.1 C4.1
VSW  (via drill 0.35)
  Top 0.203: IC1.91 28.82,56.25 28.82,53.88 v28.86,53.85 | v45.72,60.2 45.72,62.74 L1.2
  Bottom 0.203: v28.86,53.85 27.84,52.83 27.84,50.83 36.58,50.83 36.58,56.9 41.15,56.9 41.15,60.2 v45.72,60.2

## Text on the board
tPlace: 3.3V / GND / PB3 / PB2 / PB1 / PB0 / PB31 / PA27 / PB25 / PB24 / PB23 / PB22 / PA25 / PA24 / PA23 / PA22 / PA21 | RESET | PA0 / PA1 / PC0 / PC1 / PC2 / PC3 / PA2 / PA3 / PB4 / PB5 / PB6 / PB7 / PB8 / PB9 / PA4 / PA5 / PA6 / PA7 / PC5 / PC6 / PC7 / PB14 / PB15 / PC10 / PC11 | PA20 / PB21 / PB20 / PB19 / PB18 / PB17 / PB16 / PC21 / PC20 / PC19 / PC18 / PC17 / PC16 / PA19 / PA18 / PA17 / PA16 / PA15 / PA14 / PA13 / PA12 / PC15 / PC14 / PC13 / PC12 | + (3.3V) -
bPlace: RESETN / SWO / SWCLK / SWDIO / TRACEDATA[0] / TRACEDATA[1] / TRACEDATA[2] / TRACEDATA[3] / TRACECLK